# Altium PCB OCP2PCIe-H-F-4.PcbDoc
Units mm, origin at the board's own origin, x right, y up, seen from the top; angles counter-clockwise.
Board outline 100 x 82.75 mm, 2 copper layers (Top Layer, Bottom Layer); 19 components, 30 nets, 222 pads, 151 vias.
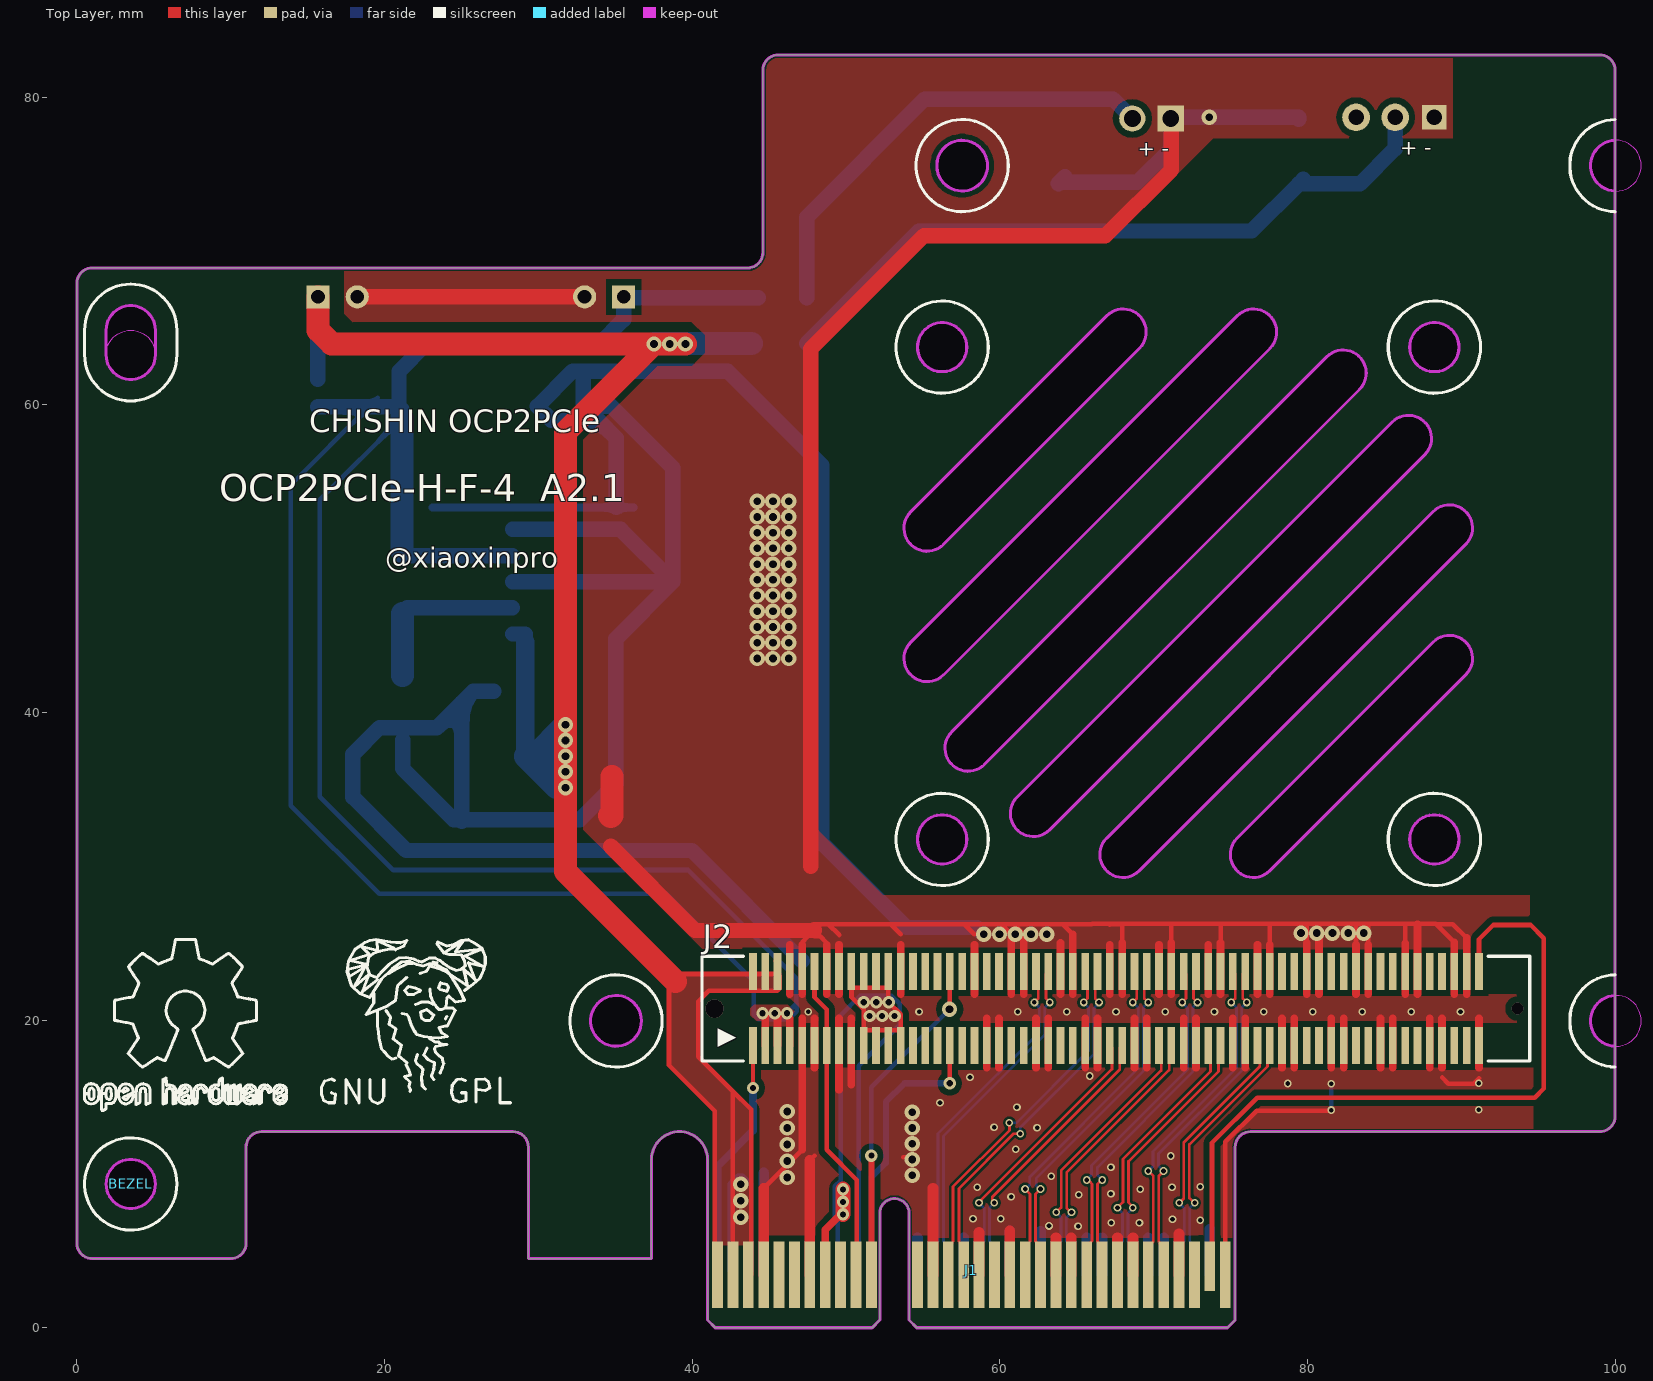
[diagram p0: Top Layer view]
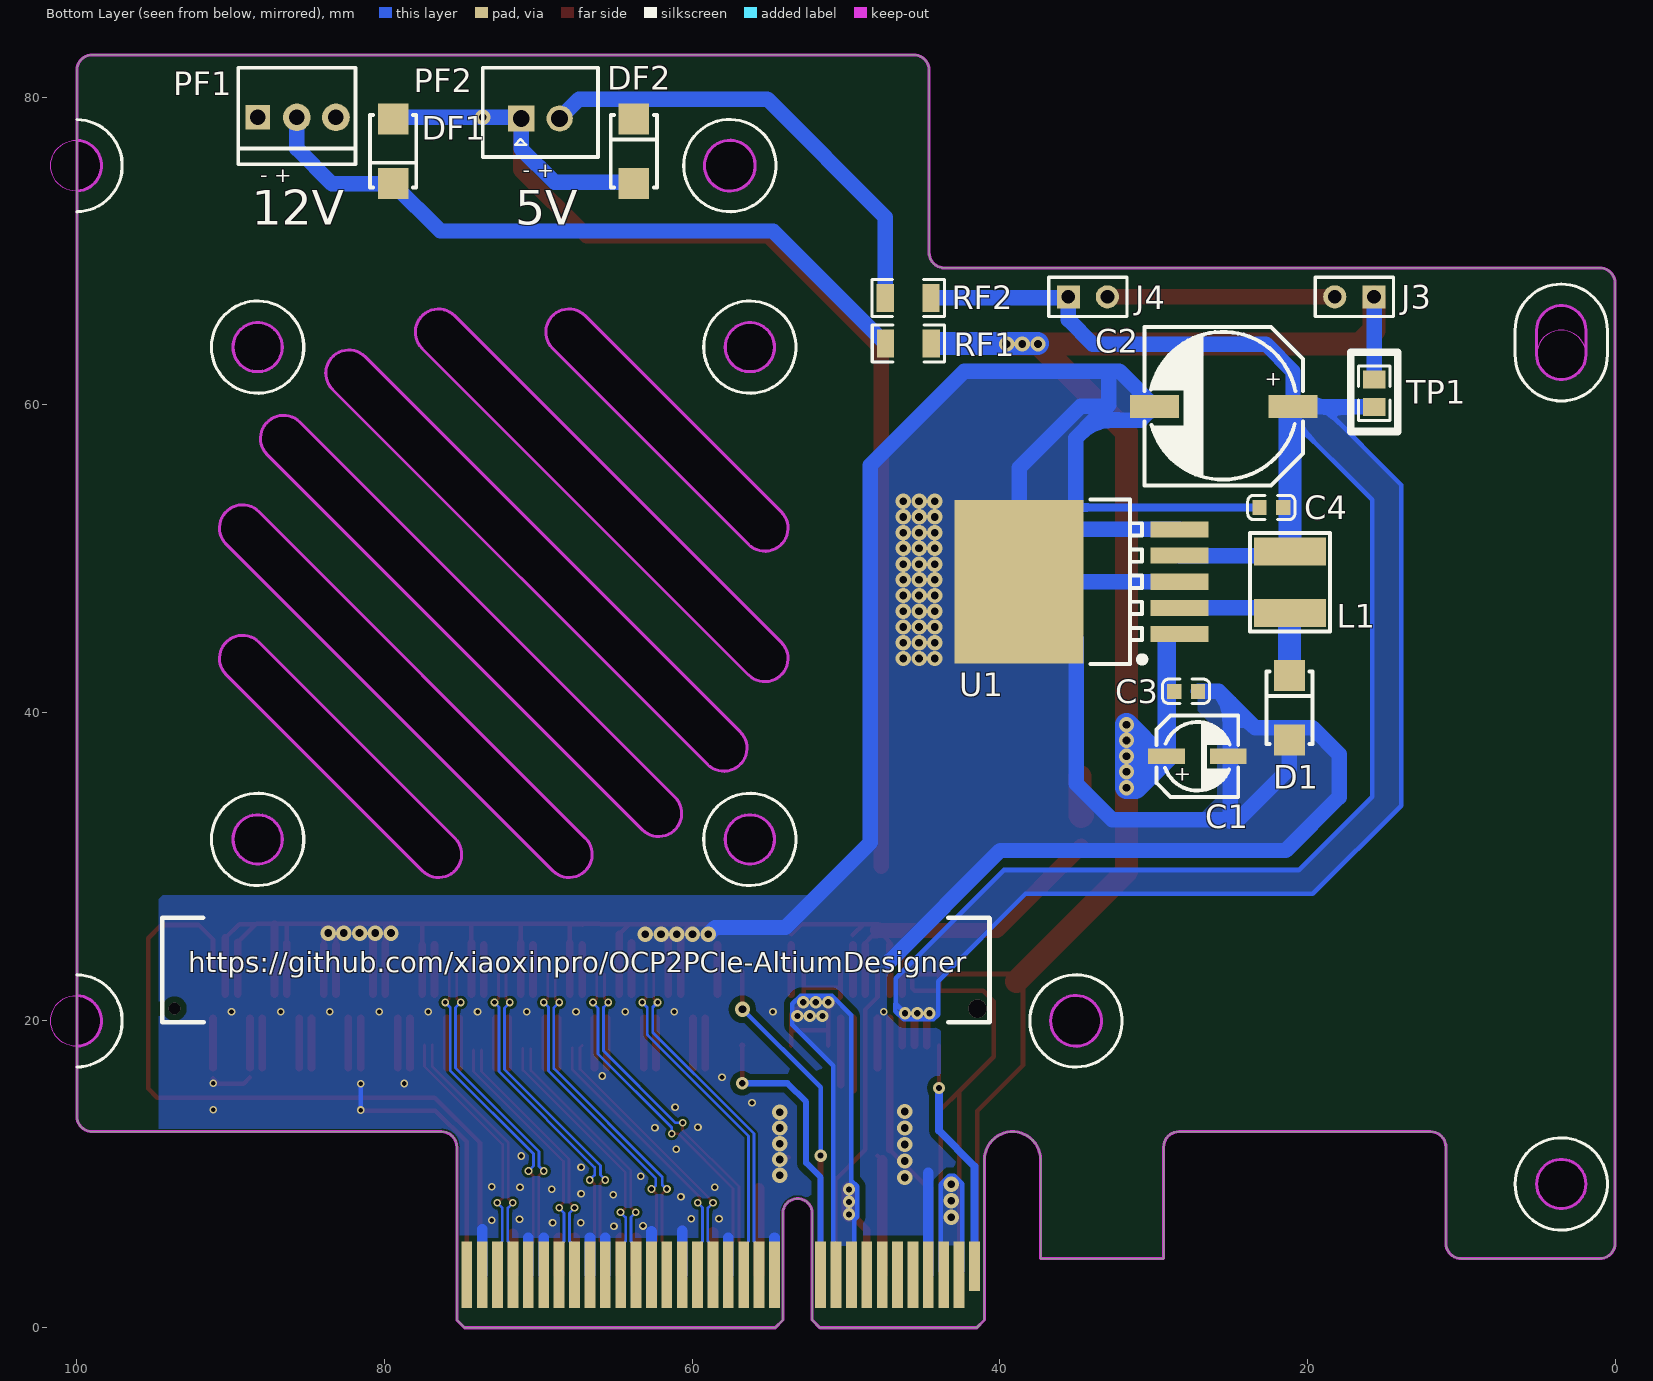
[diagram p1: Bottom Layer view, seen from below]
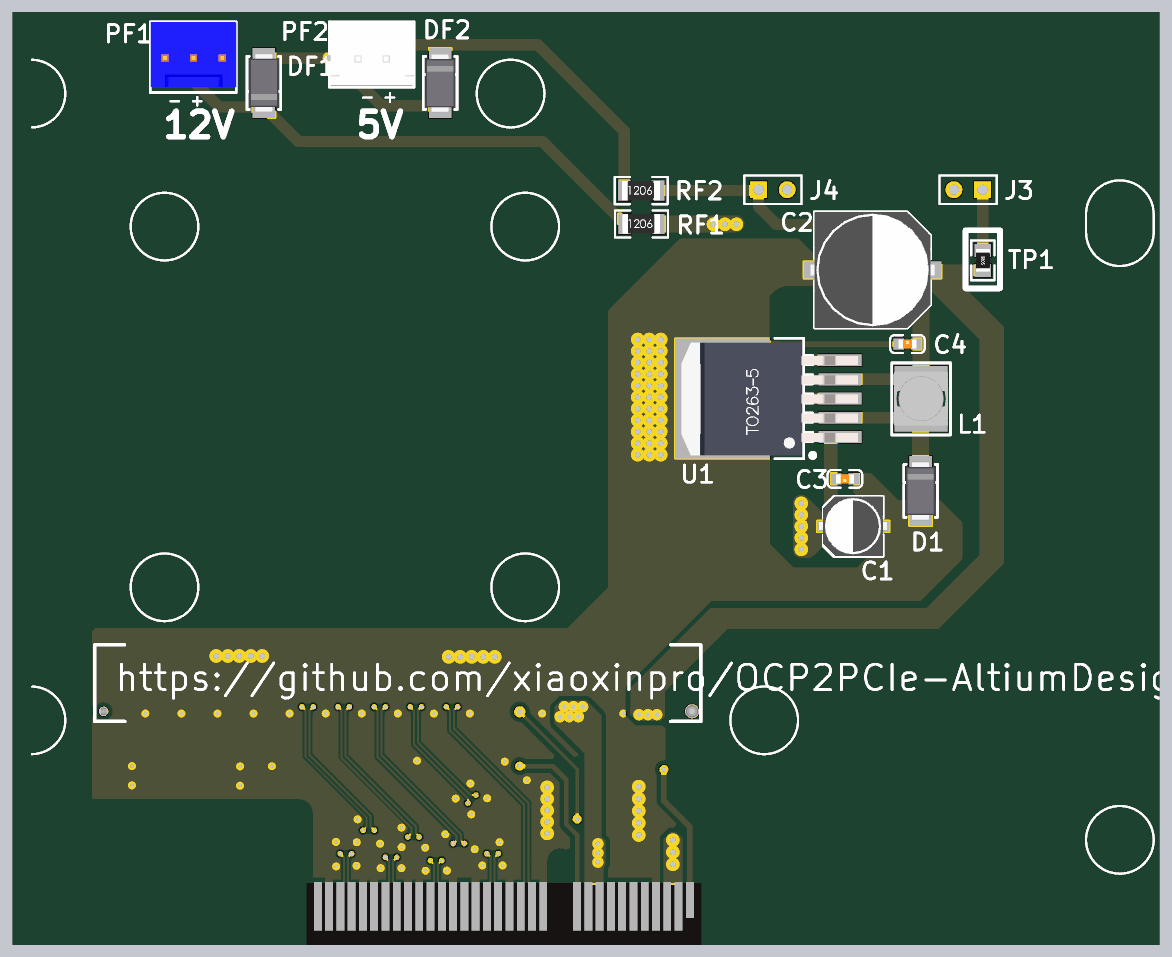
[diagram p2: 3D render of the assembled board from below, using the file's embedded part models]

## Layer stack, top to bottom
Top Solder: solder mask 0.0102, Solder Resist, Dk 3.5
Top Layer: signal copper 0.0356
Dielectric 1: dielectric 0.32, FR-4, Dk 4.8
Bottom Layer: signal copper 0.0356
Bottom Solder: solder mask 0.0102, Solder Resist, Dk 3.5

## Board outline
1,4.5 10,4.5 ccw(c10,5.5) 11,5.5 11,11.75 cw(c12,11.75) 12,12.75 28.35,12.75 cw(c28.35,11.75) 29.35,11.75 29.35,4.5 37.35,4.5 37.35,10.925 cw(c39.175,10.925) 41,10.925 41,0.5 41.5,0 51.7,0 52.2,0.5 52.2,7.45 cw(c53.15,7.45) 54.1,7.45 54.1,0.5 54.6,0 74.8,0 75.3,0.5 75.3,11.75 cw(c76.3,11.75) 76.3,12.75 99,12.75 ccw(c99,13.75) 100,13.75 100,81.75 ccw(c99,81.75) 99,82.75 45.6,82.75 ccw(c45.6,81.75) 44.6,81.75 44.6,69.9 cw(c43.6,69.9) 43.6,68.9 1,68.9 ccw(c1,67.9) 0,67.9 0,5.5 ccw(c1,5.5)
cut-out: 1.9,63.25 1.9,64.85 cw(c3.5,64.85) 5.1,64.85 5.1,63.25 cw(c3.5,63.25)
cut-out: 56.876,38.741 ccw(c57.937,37.68) 58.998,36.619 58.998,36.62 83.381,61.002 ccw(c82.32,62.063) 81.259,63.123
cut-out: 61.119,34.498 ccw(c62.18,33.437) 63.241,32.376 63.241,32.377 87.623,56.759 87.624,56.759 ccw(c86.563,57.82) 85.502,58.881
cut-out: 75.422,31.831 ccw(c76.483,30.77) 77.544,29.709 77.543,29.709 90.291,42.457 ccw(c89.23,43.517) 88.169,44.578 88.17,44.578
cut-out: 66.94,31.835 ccw(c68.001,30.774) 69.062,29.713 90.287,50.938 ccw(c89.226,51.999) 88.165,53.059 88.166,53.059
cut-out: 54.213,44.562 ccw(c55.274,43.502) 56.335,42.441 56.334,42.441 77.559,63.666 77.56,63.666 ccw(c76.499,64.727) 75.438,65.787
cut-out: 54.209,53.043 ccw(c55.27,51.983) 56.331,50.922 56.33,50.922 69.078,63.67 ccw(c68.017,64.73) 66.956,65.791 66.957,65.791
cut-out: 98.4,19.95 ccw(c100.05,19.95) 100.05,18.3 ccw(c100.05,19.95) 101.7,19.95 ccw(c100.05,19.95) 100.05,21.6 ccw(c100.05,19.95)
cut-out: 86.65,31.75 ccw(c88.25,31.75) 88.25,30.15 ccw(c88.25,31.75) 89.85,31.75 ccw(c88.25,31.75) 88.25,33.35 ccw(c88.25,31.75)
cut-out: 54.65,31.75 ccw(c56.25,31.75) 56.25,30.15 ccw(c56.25,31.75) 57.85,31.75 ccw(c56.25,31.75) 56.25,33.35 ccw(c56.25,31.75)
cut-out: 33.4,19.95 ccw(c35.05,19.95) 35.05,18.3 ccw(c35.05,19.95) 36.7,19.95 ccw(c35.05,19.95) 35.05,21.6 ccw(c35.05,19.95)
cut-out: 54.65,63.75 ccw(c56.25,63.75) 56.25,62.15 ccw(c56.25,63.75) 57.85,63.75 ccw(c56.25,63.75) 56.25,65.35 ccw(c56.25,63.75)
cut-out: 86.65,63.75 ccw(c88.25,63.75) 88.25,62.15 ccw(c88.25,63.75) 89.85,63.75 ccw(c88.25,63.75) 88.25,65.35 ccw(c88.25,63.75)
cut-out: 98.4,75.55 ccw(c100.05,75.55) 100.05,73.9 ccw(c100.05,75.55) 101.7,75.55 ccw(c100.05,75.55) 100.05,77.2 ccw(c100.05,75.55)
cut-out: 57.55,73.9 cw(c57.55,75.55) 55.9,75.55 cw(c57.55,75.55) 57.55,77.2 cw(c57.55,75.55) 59.2,75.55 cw(c57.55,75.55)
cut-out: 3.5,61.65 cw(c3.5,63.25) 1.9,63.25 cw(c3.5,63.25) 3.5,64.85 cw(c3.5,63.25) 5.1,63.25 cw(c3.5,63.25)
cut-out: 1.9,9.35 ccw(c3.5,9.35) 3.5,7.75 ccw(c3.5,9.35) 5.1,9.35 ccw(c3.5,9.35) 3.5,10.95 ccw(c3.5,9.35)

## Design rules (kind name [scope] priority, off if disabled: settings)
Clearance "Schematic Clearance Constraint" [InNetClass('PCIe')] p1: gap=0.178 ignorepadtopadclearanceinfootprint=FALSE
Clearance Clearance_1 [OnLayer('Keep-Out Layer')] p2: gap=0.1 ignorepadtopadclearanceinfootprint=FALSE
Clearance Clearance_InPoly [(InPoly)] p3: gap=0.4 ignorepadtopadclearanceinfootprint=FALSE
Clearance [All] p4: gap=0.254 ignorepadtopadclearanceinfootprint=FALSE
ComponentClearance [All] p1 off: gap=0.254 collisioncheckmode=3 verticalgap=0.254 showdistances=FALSE
Height [All] p1 off: minheight=0 maxheight=25.4 prefheight=12.7
MinimumSolderMaskSliver [All] p1 off: minsoldermaskwidth=0.254
PlaneClearance [All] p1: clearance=0.8
PlaneConnect [All] p1: planeconnectstyle=Direct reliefexpansion=0.508 reliefentries=4 reliefconductorwidth=0.254 reliefairgap=0.254
PolygonConnect [All] p1: connectstyle=Direct reliefconductorwidth=0.254 reliefentries=4 polygonreliefangle="90 Angle" airgapwidth=0.254
RoutingVias "Schematic Routing Via Style" [InNetClass('PCIe')] p1: holewidth=0.356 width=0.635 viastyle="Through Hole" minholewidth=0.356 minwidth=0.635 maxholewidth=0.356 maxwidth=0.635
RoutingVias [All] p2: holewidth=1 width=0.5 viastyle="Through Hole" minholewidth=0 minwidth=0 maxholewidth=10 maxwidth=10
SilkToSilkClearance [All] p1 off: silktosilkclearance=0
SilkToSolderMaskClearance [IsPad] p1 off: minsilkscreentomaskgap=0 clearancetoexposedcopper=TRUE
SolderMaskExpansion [All] p1: expansion=0.102
UnRoutedNet [All] p1: checkbadconnections=TRUE
Width "Schematic Width Constraint" [InNetClass('PCIe')] p1: maxlimit=0.178 minlimit=0.178 preferedwidth=0.178
Width [All] p2: maxlimit=10 minlimit=0.254 preferedwidth=0.3
22 further rules are at their usual default settings.

## Classes and differential pairs
net class PCIe: HSI0_N HSI0_P HSI1_N HSI1_P HSI2_N HSI2_P HSI3_N HSI3_P HSO0_N HSO0_P HSO1_N HSO1_P HSO2_N HSO2_P HSO3_N HSO3_P REFCLK_N REFCLK_P

## Components (designator, comment, footprint, x,y, rotation, side; value= is the part's Value field where it differs from the comment)
BEZEL "BEZEL" BEZEL 3.517,9.362 r0 top
C1 "100uF" CAP-SMD_BD5.0-L5.3-W5.3-FD 27.151,37.149 r180 bottom
C2 "1000uF" CAP-SMD_BD10.0-L10.3-W10.3-FD 25.439,59.904 r0 bottom
C3 "100nF" 0603_C 27.89,41.375 r0 bottom
C4 "100nF" 0603_C 22.351,53.329 r180 bottom
D1 "SS34" SMA(DO-214AC)_S1 21.172,40.308 r270 bottom
DF1 "SS14" SMA(DO-214AC)_S1 79.437,76.49 r90 bottom
DF2 "SS14" SMA(DO-214AC)_S1 63.793,76.49 r270 bottom
J1 "PCI Express x4" "PCI EXPRESS X4" 41,8.4 r0 top locked
J2 "Conn_02x40_Top_Bottom" Conn_02x40_Top_Bottom 43.95,18.35 r0 top locked
J3 "Conn_01x02" Conn_01x02 15.684,67.022 r0 bottom
J4 "Conn_01x02" Conn_01x02 35.548,67.022 r180 bottom
L1 "100uH" SMD_5050 21.134,48.464 r90 bottom
PF1 "KF2510_3" CONN-KF_2510_3PIN 85.701,78.689 r0 bottom
PF2 "XH2.50_2" CONN-TH_P2.50_2PIN 69.864,78.615 r0 bottom
RF1 "470Ω" 1206_R 45.939,63.989 r180 bottom
RF2 "470Ω" 1206_R 45.964,66.944 r180 bottom
TP1 "0Ω" 0805_R 15.657,60.756 r270 bottom
U1 "LM2576SX-5.0" TO-263-5 28.446,48.5 r180 bottom

## Footprints (in the part's own frame and the unit in brackets; to place one, negate y for a bottom-side part, rotate by r counter-clockwise, add the part's x,y. Pads: shape width x height; smd on the part's side, far side on the other; paste and mask are expansions set on the pad)
0603_C [mm]
  rect 0.93x0.98 smd: 1(-0.77,0) 2(0.77,0)
  silkscreen extent -1.53,-0.79 1.54,0.79, body extent -0.8,-0.4 0.8,0.4, height 0.3
0805_R [mm]
  rect 1.16x1.47 smd: 1(-0.89,0) 2(0.89,0)
  silkscreen extent -1.77,-1.04 1.77,1.03, body extent -1,-0.63 1,0.63, height 0.49
1206_R [mm]
  rect 1.13x1.8 smd: 1(-1.49,0) 2(1.49,0)
  silkscreen extent -2.36,-1.2 2.35,1.2, body extent -1.7,-0.86 1.65,0.87, height 0.85
BEZEL [mm] "PCIe挡板"
  body extent -21.23,-24.45 5.2,96.64, height 16.6
CAP-SMD_BD5.0-L5.3-W5.3-FD [mm]
  rect 2.4x1 smd: 1(-2,0) 2(2,0)
  silkscreen extent -2.65,-2.65 2.65,2.65, body extent -3.02,-2.62 2.98,2.68, height 5.9
CAP-SMD_BD10.0-L10.3-W10.3-FD [mm]
  rect 3.2x1.5 smd: 1(-4.5,0) 2(4.5,0)
  silkscreen extent -5.15,-5.15 5.15,5.15, body extent -5.5,-5.15 5.5,5.15, height 12.6
CONN-KF_2510_3PIN [mm]
  rect 1.6x1.6 hole 1: 1(2.54,0)
  round 1.8 hole 1: 2(0,0) 3(-2.54,0)
  silkscreen extent -3.81,-3.23 3.81,3.05, body extent -3.83,-3.21 3.77,2.59, height 11.5
CONN-TH_P2.50_2PIN [mm]
  rect 1.7x1.7 hole 1.1: 1(1.25,0)
  round 1.7 hole 1.1: 2(-1.25,0)
  silkscreen extent -3.75,-3.3 3.75,2.5, body extent -3.73,-3.41 3.67,2.34, height 7.1
Conn_01x02 [mm] "Connector; Header; 2 Position"
  rect 1.5x1.5 hole 0.9: 1(0,0)
  round 1.5 hole 0.9: 2(2.54,0)
  silkscreen extent -1.27,-1.27 3.81,1.27
Conn_02x40_Top_Bottom [mm] "Conn_02x40_Top_Bottom"
  rect 0.5x2.4 smd: 1(0,0) 2(0.8,0) 3(1.6,0) 4(2.4,0) 5(3.2,0) 6(4,0) 7(4.8,0) 8(5.6,0) 9(6.4,0) 10(7.2,0) 11(8,0) 12(8.8,0) 13(9.6,0) 14(10.4,0) 15(11.2,0) 16(12,0) 17(12.8,0) 18(13.6,0) 19(14.4,0) 20(15.2,0) 21(16,0) 22(16.8,0) 23(17.6,0) 24(18.4,0) 25(19.2,0) 26(20,0) 27(20.8,0) 28(21.6,0) 29(22.4,0) 30(23.2,0) 31(24,0) 32(24.8,0) 33(25.6,0) 34(26.4,0) 35(27.2,0) 36(28,0) 37(28.8,0) 38(29.6,0) 39(30.4,0) 40(31.2,0) 41(32,0) 42(32.8,0) 43(33.6,0) 44(34.4,0) 45(35.2,0) 46(36,0) 47(36.8,0) 48(37.6,0) 49(38.4,0) 50(39.2,0) 51(40,0) 52(40.8,0) 53(41.6,0) 54(42.4,0) 55(43.2,0) 56(44,0) 57(44.8,0) 58(45.6,0) 59(46.4,0) 60(47.2,0) 61(0,4.8) 61(0,4.8) 62(0.8,4.8) 63(1.6,4.8) 64(2.4,4.8) 65(3.2,4.8) 66(4,4.8) 67(4.8,4.8) 68(5.6,4.8) 69(6.4,4.8) 70(7.2,4.8) 71(8,4.8) 72(8.8,4.8) 73(9.6,4.8) 74(10.4,4.8) 75(11.2,4.8) 76(12,4.8) 77(12.8,4.8) 78(13.6,4.8) 79(14.4,4.8) 80(15.2,4.8) 81(16,4.8) 82(16.8,4.8) 83(17.6,4.8) 84(18.4,4.8) 85(19.2,4.8) 86(20,4.8) 87(20.8,4.8) 88(21.6,4.8) 89(22.4,4.8) 90(23.2,4.8) 91(24,4.8) 92(24.8,4.8) 93(25.6,4.8) 94(26.4,4.8) 95(27.2,4.8) 96(28,4.8) 97(28.8,4.8) 98(29.6,4.8) 99(30.4,4.8) 100(31.2,4.8) 101(32,4.8) 102(32.8,4.8) 103(33.6,4.8) 104(34.4,4.8) 105(35.2,4.8) 106(36,4.8) 107(36.8,4.8) 108(37.6,4.8) 109(38.4,4.8) 110(39.2,4.8) 111(40,4.8) 112(40.8,4.8) 113(41.6,4.8) 114(42.4,4.8) 115(43.2,4.8) 116(44,4.8) 117(44.8,4.8) 118(45.6,4.8) 119(46.4,4.8) 120(47.2,4.8)
  silkscreen extent -3.3,-1 50.5,5.8, body extent -3.3,-1 50.5,5.8, height 11.8
"PCI EXPRESS X4" [mm] "PCI Express x4"
  rect 0.7x3.2 smd far side: A1(0.65,-4.4)
  rect 0.7x4.3 smd far side: A2(1.65,-4.95) A3(2.65,-4.95) A4(3.65,-4.95) A5(4.65,-4.95) A6(5.65,-4.95) A7(6.65,-4.95) A8(7.65,-4.95) A9(8.65,-4.95) A10(9.65,-4.95) A11(10.65,-4.95) A12(13.65,-4.95) A13(14.65,-4.95) A14(15.65,-4.95) A15(16.65,-4.95) A16(17.65,-4.95) A17(18.65,-4.95) A18(19.65,-4.95) A19(20.65,-4.95) A20(21.65,-4.95) A21(22.65,-4.95) A22(23.65,-4.95) A23(24.65,-4.95) A24(25.65,-4.95) A25(26.65,-4.95) A26(27.65,-4.95) A27(28.65,-4.95) A28(29.65,-4.95) A29(30.65,-4.95) A30(31.65,-4.95) A31(32.65,-4.95) A32(33.65,-4.95)
  rect 0.7x4.3 smd: B1(0.65,-4.95) B2(1.65,-4.95) B3(2.65,-4.95) B4(3.65,-4.95) B5(4.65,-4.95) B6(5.65,-4.95) B7(6.65,-4.95) B8(7.65,-4.95) B9(8.65,-4.95) B10(9.65,-4.95) B11(10.65,-4.953) B12(13.65,-4.95) B13(14.65,-4.95) B14(15.65,-4.95) B15(16.65,-4.95) B16(17.65,-4.95) B17(18.65,-4.95) B18(19.65,-4.95) B19(20.65,-4.95) B20(21.65,-4.95) B21(22.65,-4.95) B22(23.65,-4.95) B23(24.65,-4.95) B24(25.65,-4.95) B25(26.65,-4.95) B26(27.65,-4.95) B27(28.65,-4.95) B28(29.65,-4.95) B29(30.65,-4.95) B30(31.65,-4.95) B32(33.65,-4.95)
  rect 0.7x3.2 smd: B31(32.65,-4.4)
  Keep-Out Layer lines w0.2: 0,0 0,-7.9 0.5,-8.4 10.7,-8.4 11.2,-7.9 11.2,-0.95 cw(c12.15,-0.95) 13.1,-0.95 13.1,-7.9 13.6,-8.4 33.8,-8.4 34.3,-7.9 34.3,0
SMA(DO-214AC)_S1 [mm]
  rect 2x2 smd: 1(2.1,0) 2(-2.1,0)
  silkscreen extent -2.35,-1.5 2.35,1.5, body extent -2.59,-1.3 2.61,1.3, height 2.4
SMD_5050 [mm] "贴片电感5.0x5.0"
  rect 1.8x4.7 smd: 1(-2,0) 2(2,0)
  silkscreen extent -3.2,-2.6 3.2,2.6, body extent -2.38,-2.4 2.42,2.4, height 2.8
TO-263-5 [mm]
  rect 8.4x10.65 smd: 0(-10.3,0)
  rect 3.8x1.05 smd: 1(0.127,-3.4) 2(0.127,-1.7) 3(0.127,0) 4(0.127,1.7) 5(0.127,3.4)
  silkscreen extent -5.65,-5.35 -2.1,5.35, body extent -13.96,-5.04 1.71,4.96, height 4.83

## Part data
BEZEL: "PCIe挡板"
C1 C2: library part 7343_CP, "贴片铝电解电容", Package=3528, SuppliersPartNumber=C16133, ComponentLink1Description=¹©Ó, ComponentLink1URL=http://www.szlcsc.com/product/details_16815.html, Supplier=LC
C3 C4: library part "0805 Cap", "贴片电容", Package=0805, SuppliersPartNumber=C28323, ComponentLink1Description=¹©Ó, ComponentLink1URL=http://www.szlcsc.com/product/details_29074.html, Supplier=LC
D1: library part "SMA(DO-214AC) M7", "肖特基二极管", Package=SMA(DO-214AC), SuppliersPartNumber=C95872, ComponentLink1Description=¹©Ó, ComponentLink1URL=http://www.szlcsc.com/product/details_2841.html, Notepad="1N4007 4007 编号C2464 已经", Supplier=LC
DF1 DF2: library part "SMA(DO-214AC) M7", "二极管", Package=SMA(DO-214AC), SuppliersPartNumber=C95872, ComponentLink1Description=¹©Ó, ComponentLink1URL=http://www.szlcsc.com/product/details_2841.html, Notepad="1N4007 4007 编号C2464 已经", Supplier=LC
J1: "插座-PCIe"
J2: "插座-0.8mm"
J3 J4: "插座-2.54mm", LatestRevisionDate=17-Jul-2002, LatestRevisionNote="Re-released for DXP Platform.", Publisher="Altium Limited"
L1: library part SDM_Inductors, "贴片电感", Package=0402, SuppliersPartNumber=C24563, ComponentLink1Description=¹©Ó, ComponentLink1URL=http://www.szlcsc.com/product/details_25303.html, Supplier=LC
PF1: library part Conn_KF2510_3, "插座-KF2510-3", LatestRevisionDate=17-Jul-2002, LatestRevisionNote="Re-released for DXP Platform.", Publisher="Altium Limited"
PF2: library part Conn_XH2.50_2, "插座-2.50mm", LatestRevisionDate=17-Jul-2002, LatestRevisionNote="Re-released for DXP Platform.", Publisher="Altium Limited"
RF1 RF2: library part 1206_R, "贴片电阻", Package=0805, SuppliersPartNumber=C17477, ComponentLink1Description=¹©Ó, ComponentLink1URL=http://www.szlcsc.com/product/details_18165.html, Supplier=LC
TP1: library part "0805 0Ω (0R0) 1%", "贴片电阻", Package=0805, SuppliersPartNumber=C17477, ComponentLink1Description=¹©Ó, ComponentLink1URL=http://www.szlcsc.com/product/details_18165.html, Supplier=LC
U1: "DC-DCоƬ", Package=TO-263-5, SuppliersPartNumber=C34465, ComponentLink1Description=¹©Ó, ComponentLink1URL=http://www.szlcsc.com/product/details_35434.html, Supplier=LC

## Via types
v1: diameter 0.5, hole 0.3, Top Layer to Bottom Layer, 68 vias
v2: diameter 1, hole 0.5, Top Layer to Bottom Layer, 66 vias
v3: diameter 0.8, hole 0.4, Top Layer to Bottom Layer, 15 vias
v4: diameter 1.2, hole 1.2, Top Layer to Bottom Layer, 1 vias
v5: diameter 0.8, hole 0.8, Top Layer to Bottom Layer, 1 vias

## Nets (pads, with @x,y where several pads share a name; then routed paths per layer and width w, separated by ;. In a path a pad name is that pad's centre, name@x,y a point inside that pad or via, vN(x,y) a via of type N, cw(c..) or ccw(c..) an arc to the next point about the centre after c; other vN are vias at no path point)
3V3AUX: J1.B10 J2.7 J2.66 | length 19.9
  Top Layer w0.3: J2.66 47.95,21.49 48.75,20.69 J2.7 48.75,11.567 50.71,9.607 J1.B10@50.71,4.37
+3.3: J1.A9 J1.A10 J1.B8 J2.10 J2.11 J2.12 J2.13 J2.69 J2.70 J2.71 J2.72 | length 64.2
  Top Layer w0.3: J2.10 51.15,20.707 50.357,21.5 J2.69@50.357,22.193 ; J2.10@51.156,19.346 J2.13@53.55,19.346 ; J2.72@52.551,22.1 50.45,22.1 J2.69@50.357,22.193 ; J2.72 52.75,21.175 53.55,20.375 J2.13@53.55,19.346 ; J2.13 J2.13@53.55,19.346 ; J2.13@53.569,19.346 J2.13@53.55,19.346 ; J2.69@50.357,22.193 50.357,23.143 J2.69 50.35,22.2 J2.69@50.357,22.193
  Top Layer w0.5: J1.B8 48.65,6.372 v3@49.65,7.372
  Top Layer w1: v3(49.802,7.372) v3(49.802,8.184) v3(49.802,8.997)
  Bottom Layer w0.3: J1.A9@49.454,3.646 49.454,7.027 49.277,7.205 49.277,8.997 49.277,9.196 49.65,9.569 ; v3@49.65,8.997 49.65,9.569 ; v3(49.802,7.372) v3(49.802,8.184) v3(49.802,8.997) ; J1.A10@50.841,3.45 50.841,17.034 53.493,19.686 53.493,21.061 52.985,21.569 50.889,21.569 49.65,20.329 49.65,9.569
  other v3: 51.538,20.269 52.35,20.269 53.162,20.269 51.156,21.162 51.968,21.162 52.781,21.162
+5: C2.1 C4.2 J2.2 J2.3 J2.4 J4.1 L1.2 RF2.2 TP1.2 U1.4 | length 193.5
  Top Layer w0.3: v3@44.75,20.141 45.009,20.4 v3@45.543,20.4 ; v3@45.536,20.451 45.543,20.444 v3@45.543,20.4 ; J2.3@45.543,18.357 J2.3 ; v3@46.35,20.103 46.053,20.4 v3@45.543,20.4
  Top Layer w0.5: J2.2 v3@44.75,20.141 ; J2.3@45.543,18.357 v3@45.543,20.4 ; J2.4 v3@46.35,20.103
  Bottom Layer w0.3: C2.1@19.571,60.452 18.984,59.866 13.906,54.788 13.906,33.947 19.647,28.207 38.329,28.207 44.006,22.529 44.006,20.35 44.311,20.045 44.997,20.045 ; C2.1@21.134,59.172 15.786,53.824 15.786,34.531 20.561,29.756 39.751,29.756 46.775,22.732 46.775,21.061 ; v3(45.371,20.451) 45.371,20.419 44.997,20.045 ; v3(46.165,20.451) 46.775,21.061 ; 44.997,20.045 46.254,20.045 46.787,20.578 46.787,21.048 46.775,21.061
  Bottom Layer w1: TP1.2 18.984,59.866 20.901,59.866 C2.1 ; L1.2 21.398,50.2 U1.4 ; C2.1@21.134,59.172 21.134,59.709 C2.1 ; RF2.2@44.315,66.952 35.618,66.952 J4.1 35.548,65.532 33.96,63.944 22.705,63.944 20.939,62.178 C2.1
  Bottom Layer w1.5: L1.2 C2.1@21.134,59.172
  other v3: 44.578,20.451
+12: C1.1 C3.2 J1.A2 J1.A3 J1.B1 J1.B2 J1.B3 J2.61 J2.62 J2.63 J3.1 RF1.2 TP1.1 U1.1 | length 186.8
  Top Layer w0.254: J2.63@45.427,22.997 45.55,23.12 J2.63 45.55,23.719 J2.63@45.427,23.842
  Top Layer w0.3: 38.912,22.518 38.494,22.1 38.494,17.06 41.46,14.095 J1.B1@41.46,3.45 ; 39.391,22.997 J2.61@43.95,22.997 ; J1.B2 42.65,15.368 ; J1.B3@43.828,3.45 43.828,14.181 43.837,14.181 ; 43.828,14.19 42.65,15.368 ; J2.61@43.95,23.15 J2.61@43.95,22.997 ; J2.63@45.427,22.997 J2.61@43.95,22.997 ; J2.63@45.696,22.919 45.696,22.076 45.52,21.9 43.95,21.9 ; 42.65,15.368 40.387,17.632 40.387,21.213 41.073,21.9 43.95,21.9 ; 43.95,21.9 J2.61@43.95,22.997
  Top Layer w1.5: J3.1 15.684,64.834 16.561,63.957 v2(37.516,63.957) ; 38.912,22.518 31.763,29.667 v2(31.763,35.115) v2(31.763,36.138) v2(31.763,37.16) v2(31.763,38.183) v2(31.763,39.205) 31.763,58.204 v2(37.516,63.957) ; v2(39.56,63.957) v2(38.538,63.957) v2(37.516,63.957)
  Bottom Layer w0.3: J1.A2@42.444,3.656 42.444,9.364 42.965,9.885 43.295,9.885 43.841,9.339 J1.A3@43.841,3.666
  Bottom Layer w1: TP1.1 15.657,66.996 J3.1 ; U1.1 29.151,45.1 29.151,44.552
  Bottom Layer w1.2: C1.1 29.151,44.552
  Bottom Layer w1.5: 30.975,36.176 30.975,38.221 ; v2@37.556,63.997 43.84,63.997 ; C1.1 31.185,35.115 v2(31.763,35.115) v2(31.763,36.138) v2(31.763,37.16) v2(31.763,38.183) v2(31.763,39.205) C1.1@29.718,37.16 ; C1.1 29.162,37.16 C1.1@29.707,37.16 ; C1.1 C1.1@29.707,37.149 ; C1.1@29.707,37.149 C1.1@29.707,37.16 ; C1.1@29.707,37.149 C1.1@29.718,37.16 ; C1.1@29.707,37.16 C1.1@29.718,37.16
  other v2: 43.155,7.18 43.155,8.253 43.155,9.326
GND: C1.2 C2.2 C3.1 C4.1 D1.1 DF1.1 DF2.1 J1.A4 J1.A12 J1.A15 J1.A18 J1.A20 J1.A23 J1.A24 J1.A27 J1.A28 J1.A31 J1.B4 J1.B7 J1.B13 J1.B16 J1.B18 J1.B21 J1.B22 J1.B25 J1.B26 J1.B29 J1.B32 J2.5 J2.6 J2.8 J2.9 J2.20 J2.21 J2.24 J2.25 J2.28 J2.29 J2.32 J2.33 J2.36 J2.37 J2.40 J2.41 J2.44 J2.45 J2.48 J2.49 J2.52 J2.53 J2.56 J2.57 J2.60 J2.64 J2.65 J2.67 J2.68 J2.73 J2.79 J2.82 J2.83 J2.86 J2.87 J2.90 J2.91 J2.94 J2.95 J2.98 J2.99 J2.102 J2.103 J2.106 J2.107 J2.110 J2.111 J2.114 J2.115 J2.118 J2.119 J3.2 J4.2 PF1.1 PF2.1 U1.0 U1.3 U1.5 | length 688.7
  Top Layer w0.3: 44.65,9.068 47.15,11.568 ; 46.35,25.513 46.66,25.823 ; 47.15,25.068 47.524,25.442 ; 47.65,10.875 47.95,11.175 ; 47.93,25.442 48.324,25.442 48.75,25.016 ; 47.93,26.242 48.845,26.242 ; J2.8@49.467,19.4 J2.8@49.494,19.373 ; 49.55,25.537 48.845,26.242 ; 53.55,25.588 52.896,26.242 ; 53.724,11.088 v2@54.306,11.088 ; 58.35,25.588 57.696,26.242 ; v2@60.75,25.588 60.096,26.242 ; v2@61.55,25.588 60.896,26.242 ; 64.091,26.237 64.745,25.583 ; 67.154,26.199 67.111,26.242 67.953,26.242 J2.91@67.953,23.153 ; J2.95 71.151,26.24 ; J2.99 74.351,26.24 ; J1.B32 74.65,12.08 76.69,14.12 v1@81.324,14.12 ; J2.103 77.551,26.24 ; J2.106@79.952,23.152 79.952,26.197 ; v2@80.751,25.658 80.751,26.24 ; J2.110 83.152,26.197 ; J2.111 83.951,26.24 ; J2.114 86.352,26.197 ; 88.75,16.271 89.155,15.867 90.806,15.867 91.15,16.211 ; 89.55,25.062 88.37,26.242 ; 90.35,25.339 89.447,26.242 88.37,26.242 ; 48.845,26.242 52.896,26.242 ; 52.896,26.242 57.696,26.242 ; 57.696,26.242 60.096,26.242 ; 60.096,26.242 60.896,26.242 ; 60.896,26.242 65.966,26.242 65.998,26.275 88.337,26.275 88.37,26.242
  Top Layer w0.5: 46.35,21.702 46.35,24.902 ; 47.15,11.568 J2.5 ; 47.15,16.902 47.15,20.102 ; 47.15,21.702 47.15,24.902 ; 47.95,16.902 47.95,20.102 ; 48.75,21.702 48.75,24.902 ; 49.55,15.475 J2.8@49.55,17.341 ; 49.55,16.902 49.55,20.102 ; 49.55,21.702 49.55,24.902 ; 50.35,15.8 J2.9 ; 50.35,16.902 50.35,20.102 ; 53.55,21.702 53.55,24.902 ; 58.35,21.702 58.35,24.902 ; 59.15,16.902 J2.20 59.15,20.102 ; 59.95,16.902 J2.21 59.95,20.102 ; 60.75,21.702 J2.82 v2@60.75,25.588 ; 61.55,21.702 J2.83 v2@61.55,25.588 ; 62.35,16.902 J2.24 62.35,20.102 ; 63.15,16.902 63.15,20.102 ; 63.95,21.702 63.95,24.902 ; J2.86 63.95,25.016 ; J2.87@64.745,23.145 64.745,25.583 ; 64.75,21.702 J2.87 64.75,24.902 ; 65.55,16.902 J2.28 65.55,20.102 ; 66.35,16.902 66.35,20.102 ; 67.15,21.702 J2.90 67.15,24.902 ; 67.95,21.702 J2.91 67.95,25.016 ; 68.75,16.902 J2.32 68.75,20.102 ; 69.55,16.902 J2.33 69.55,20.102 ; 70.35,21.702 J2.94 70.35,24.902 ; 71.15,21.702 71.15,24.902 ; J2.95 71.15,25.016 ; 71.95,16.902 J2.36 71.95,20.102 ; 72.75,16.902 72.75,20.102 ; 73.55,21.702 J2.98 73.55,24.902 ; 74.35,21.702 J2.99 74.35,25.016 ; 75.15,16.902 J2.40 75.15,20.102 ; 75.95,16.902 J2.41 75.95,20.102 ; 76.75,21.702 J2.102 76.75,24.902 ; 77.55,21.702 77.55,24.902 ; 78.35,16.902 J2.44 78.35,20.102 ; 79.15,16.902 79.15,20.102 ; 79.95,21.702 J2.106 79.95,25.016 ; 80.75,21.702 J2.107 80.75,24.902 ; J2.107 v2@80.751,25.658 ; 81.55,16.902 J2.48 81.55,20.102 ; 82.35,16.902 J2.49 82.35,20.102 ; 83.15,21.702 J2.110 83.15,24.902 ; 83.95,21.702 83.95,24.902 ; 84.75,16.902 J2.52 84.75,20.102 ; 85.55,16.902 85.55,20.102 ; 86.35,21.702 J2.114 86.35,24.987 ; 87.15,21.702 J2.115 87.15,24.902 ; J2.115@87.151,23.151 87.151,26.24 ; 87.95,16.902 J2.56 87.95,20.102 ; 88.75,16.902 88.75,20.102 ; 89.55,21.702 89.55,24.902 ; J2.118 89.55,25.062 ; 90.35,21.702 J2.119 90.35,25.339 ; 91.15,16.902 91.15,20.102
  Top Layer w0.7: J1.B4 44.65,9.068 ; J1.B7 47.65,10.875 ; J1.B13 55.65,9.068 ; J1.B16 58.65,6.198 ; J1.B18 60.65,6.286 ; J1.B21 63.65,5.854 ; J1.B22 64.65,5.854 ; J1.B25 67.65,5.854 ; J1.B26 68.65,5.854 ; J1.B29 71.65,6.096
  Top Layer w1: J3.2 J4.2 J4.2@32.918,66.933 ; 34.707,31.304 40.187,25.823 46.66,25.823 47.93,25.823 47.93,25.887 ; 47.701,29.997 47.701,63.627 55.067,70.993 66.865,70.993 71.151,75.278 71.151,78.652 PF2.1@71.188,78.689
  Top Layer w1.5: 34.627,33.304 34.707,33.224 ; 34.786,33.304 34.786,35.844
  Bottom Layer w0.3: v1(81.547,15.867) 81.547,14.154 v1(81.549,14.152)
  Bottom Layer w0.5: C4.1 35.061,53.329 U1.0@36.195,53.329
  Bottom Layer w0.7: J1.A4 44.65,10.065 ; J1.A12 54.65,5.854 ; J1.A15 57.65,5.854 ; J1.A18 60.65,6.286 ; J1.A20 62.65,6.261 ; J1.A23 65.65,5.854 ; J1.A24 66.65,5.854 ; J1.A27 69.65,5.854 ; J1.A28 70.65,5.854 ; J1.A31 73.65,6.399
  Bottom Layer w1: D1.1 21.172,36.359 24.511,33.02 25.032,33.02 ; 25.032,32.931 25.032,33.02 ; C3.1@27.09,41.375 25.767,41.375 25.032,40.64 ; U1.3 U1.0 ; U1.5 35.346,51.9 U1.0 ; 32.918,62.128 32.918,59.989 33.003,59.904 ; U1.0@35.061,53.329 35.061,57.846 33.907,59 ; 47.15,23.854 39.978,31.026 21.412,31.026 17.945,34.493 17.945,37.284 19.672,39.011 23.403,39.011 25.032,40.64 ; v2(58.954,25.582) 58.514,26.022 53.937,26.022 48.412,31.547 48.412,56.083 42.304,62.192 32.227,62.192 C2.2 30.843,59 33.907,59 ; DF2.1@63.816,74.368 DF2.1 DF2.1@63.876,74.473 ; DF2.1@64.237,74.835 DF2.1@63.876,74.473 ; DF1.1@79.425,78.568 DF1.1@79.437,78.568 ; DF1.1@79.437,78.689 71.188,78.689 PF2.1 71.114,76.638 68.948,74.473 DF2.1@63.876,74.473 ; 25.032,33.02 25.032,40.64 ; 25.032,33.02 32.69,33.02 35.039,35.369 35.039,44.793 U1.0 ; 33.003,59.904 33.907,59 ; 33.003,59.904 34.749,59.904 38.746,55.907 U1.0
  other v1: 65.088,6.608 63.196,6.621 67.234,6.837 69.076,6.837 73.026,6.989 71.222,7.053 58.255,7.078 60.059,7.078 60.732,8.513 65.126,8.653 67.222,8.704 69.127,9.009 58.535,9.136 71.197,9.136 73.038,9.161 63.335,9.847 67.222,10.431 71.121,11.168 61.037,11.612 62.421,13.009 59.627,13.034 91.138,14.178 61.113,14.343 56.109,14.635 78.728,15.879 91.136,15.892 58.065,16.286 65.849,16.37 47.549,20.553 54.751,20.553 61.164,20.553 64.351,20.553 67.551,20.553 70.751,20.553 73.951,20.553 77.151,20.553 80.351,20.553 83.551,20.553 86.751,20.553 89.951,20.553
  other v2: 46.178,9.771 54.306,9.917 46.178,10.844 54.306,10.939 46.178,11.917 54.306,11.961 46.178,12.99 54.306,12.984 54.306,14.006 46.178,14.063 59.976,25.582 60.999,25.582 62.021,25.582 63.043,25.582 79.579,25.658 80.601,25.658 81.623,25.658 82.646,25.658 83.668,25.658 44.228,43.512 45.25,43.512 46.272,43.512 44.228,44.534 45.25,44.534 46.272,44.534 44.228,45.556 45.25,45.556 46.272,45.556 44.228,46.579 45.25,46.579 46.272,46.579 44.228,47.601 45.25,47.601 46.272,47.601 44.228,48.623 45.25,48.623 46.272,48.623 44.228,49.646 45.25,49.646 46.272,49.646 44.228,50.668 45.25,50.668 46.272,50.668 44.228,51.691 45.25,51.691 46.272,51.691 44.228,52.713 45.25,52.713 46.272,52.713 44.228,53.735 45.25,53.735 46.272,53.735 73.614,78.689
HSI0_N: J1.A17 J2.31 | length 16.2
  Top Layer w0.178: v1@59.51,8.134 59.51,8.512 67.802,16.804 J2.31@67.802,18.203
  Bottom Layer w0.178: J1.A17@59.398,5.547 J1.A17@59.404,5.541 ; J1.A17@59.398,5.554 59.335,5.618 59.335,7.808 v1(59.645,8.119)
HSI0_P: J1.A16 J2.30 | length 16.8
  Top Layer w0.178: v1@58.778,8.075 58.778,8.301 67.289,16.811 67.289,18.211 J2.30
  Bottom Layer w0.178: v1(58.645,8.119) 58.979,7.784 58.979,5.63 58.776,5.427 J1.A16@58.725,5.427
HSI1_N: J1.A22 J2.35 | length 15.7
  Top Layer w0.178: 64.344,7.796 v1@64.636,7.504 ; 64.344,7.808 64.344,10.082 71.011,16.749 J2.35@71.011,18.149
  Bottom Layer w0.178: J1.A22@64.407,5.541 64.326,5.623 64.326,7.173 v1(64.661,7.509)
HSI1_P: J1.A21 J2.34 | length 15.9
  Top Layer w0.178: v1@63.671,7.504 63.988,7.821 63.988,10.229 70.491,16.731 J2.34@70.491,18.131
  Bottom Layer w0.178: v1(63.661,7.509) 63.97,7.2 63.97,5.63 63.899,5.559 J1.A21@63.899,5.18
HSI2_N: J1.A26 J2.39 | length 15.2
  Top Layer w0.178: 68.37,8.151 68.725,7.796 v1@68.751,7.796 ; 68.37,8.164 68.37,10.818 74.212,16.66 J2.39@74.212,18.06
  Bottom Layer w0.178: J1.A26@68.395,5.554 68.327,5.623 68.327,7.448 68.636,7.758 v1@68.636,7.796
  other v1: 68.649,7.801
HSI2_P: J1.A25 J2.38 | length 15.1
  Top Layer w0.178: v1@67.786,7.796 67.786,7.935 68.014,8.164 68.014,10.966 73.704,16.655 J2.38@73.704,18.055
  Bottom Layer w0.178: v1@67.659,7.77 67.971,7.458 67.971,5.613 J1.A25@67.9,5.541
  other v1: 67.649,7.801
HSI3_N: J1.A30 J2.43 | length 15.2
  Top Layer w0.178: v1@72.65,8.101 72.319,8.431 72.319,11.911 77.399,16.991 J2.43@77.399,18.39
  Bottom Layer w0.178: J1.A30@72.421,5.541 72.421,5.549 72.34,5.63 72.34,7.778 v1@72.65,8.088
  other v1: 72.662,8.119
HSI3_P: J1.A29 J2.42 | length 15.3
  Top Layer w0.178: v1@71.672,8.126 71.964,8.418 71.964,12.063 76.904,17.003 J2.42@76.904,18.403
  Bottom Layer w0.178: v1@71.659,8.113 71.984,7.788 71.984,5.643 J1.A29@71.819,5.478
  other v1: 71.662,8.119
HSO0_N: J1.B15 J2.89 | length 21.6
  Top Layer w0.178: J1.B15@57.397,5.549 57.341,5.605 57.341,9.052 60.902,12.613 v1(61.33,12.613) ; J2.89@66.198,22.998 66.198,21.402 v1(66.45,21.15)
  Bottom Layer w0.178: v1(61.33,12.613) 61.33,13.011 66.122,17.803 66.122,20.788 66.45,21.116 v1(66.45,21.15)
HSO0_P: J1.B14 J2.88 | length 21.6
  Top Layer w0.178: J1.B14@56.914,5.547 56.914,5.559 56.96,5.605 56.96,9.174 60.623,12.836 v1(60.623,13.32) ; v1(65.45,21.15) 65.7,21.4 J2.88@65.7,23
  Bottom Layer w0.178: v1(60.623,13.32) 61.08,13.32 65.766,18.007 65.766,20.834 v1(65.45,21.15)
HSO1_N: J1.B20 J2.93 | length 20.9
  Top Layer w0.178: J1.B20@62.426,5.516 62.319,5.623 62.319,8.697 v1(62.642,9.02) ; J2.93@69.398,22.998 69.398,21.402 v1(69.65,21.15)
  Bottom Layer w0.178: v1@62.629,8.99 62.363,9.256 62.363,9.717 69.348,16.702 69.348,20.848 v1(69.65,21.15)
HSO1_P: J1.B19 J2.92 | length 21
  Top Layer w0.178: v1(61.642,9.02) 61.964,8.699 61.964,5.613 J1.B19@61.893,5.541 ; v1(68.65,21.15) 68.9,21.4 J2.92@68.9,23
  Bottom Layer w0.178: v1@61.651,8.977 61.944,9.269 61.944,9.801 68.992,16.85 68.992,20.808 v1(68.65,21.15)
HSO2_N: J1.B24 J2.97 | length 21
  Top Layer w0.178: v1@66.65,9.593 66.587,9.593 66.345,9.351 66.345,5.618 66.685,5.278 J1.B24@66.685,5.265 ; J2.97@72.598,22.998 72.598,21.402 v1(72.85,21.15)
  Bottom Layer w0.178: v1@66.668,9.599 66.338,9.929 66.338,10.43 72.561,16.653 72.561,20.861 v1(72.85,21.15)
  other v1: 66.655,9.604
HSO2_P: J1.B23 J2.96 | length 22.8
  Top Layer w0.178: J1.B23 J1.B23@65.65,5.151 ; J1.B23@65.736,5.237 J1.B23@65.65,5.151 ; v1@65.825,9.491 65.85,9.491 65.99,9.351 65.99,5.643 65.65,5.303 J1.B23@65.65,5.151 ; v1(71.85,21.15) 72.1,21.4 J2.96@72.1,23
  Bottom Layer w0.178: v1@65.614,9.586 65.957,9.929 65.957,10.552 72.205,16.8 72.205,20.795 v1(71.85,21.15)
  other v1: 65.655,9.604
HSO3_N: J1.B28 J2.101 | length 20.3
  Top Layer w0.178: J1.B28@70.414,5.465 70.414,5.536 70.333,5.618 70.333,9.873 v1@70.63,10.171 ; J2.101@75.798,22.998 75.798,21.402 v1(76.05,21.15)
  Bottom Layer w0.178: v1@70.668,10.171 70.656,10.171 70.313,10.514 70.313,11.314 75.736,16.737 75.736,20.836 v1(76.05,21.15)
  other v1: 70.643,10.189
HSO3_P: J1.B27 J2.100 | length 20.2
  Top Layer w0.178: v1@69.665,10.171 69.978,9.858 69.978,5.625 J1.B27@69.881,5.529 ; v1(75.05,21.15) 75.3,21.4 J2.100@75.3,23
  Bottom Layer w0.178: v1@69.652,10.196 69.957,10.501 69.957,11.461 75.38,16.884 75.38,20.82 v1(75.05,21.15)
  other v1: 69.643,10.189
NetD1_2: D1.2 L1.1 U1.2 | length 11.4
  Bottom Layer w1: L1.1@21.172,46.427 L1.1 21.47,46.8 U1.2
  Bottom Layer w1.5: D1.2 L1.1@21.172,46.427
NetDF1_2: DF1.2 PF1.2 RF1.1 | length 46
  Bottom Layer w1: RF1.1 54.738,71.298 76.367,71.298 DF1.2@79.437,74.368 ; DF1.2@79.731,74.662 DF1.2@79.437,74.368 ; PF1.2 85.701,76.657 83.412,74.368 DF1.2@79.437,74.368
NetDF2_2: DF2.2 PF2.2 RF2.1 | length 30.1
  Bottom Layer w1: RF2.1 47.454,72.207 55.118,79.87 67.359,79.87 PF2.2
PERST: J1.A11 J2.17 | length 18.8
  Top Layer w0.3: J2.17@56.731,18.331 J2.17@56.741,18.341 ; v3@56.75,15.892 J2.17
  Top Layer w0.4: J2.17@56.741,18.341 J2.17
  Bottom Layer w0.4: J1.A11 51.65,9.77 52.596,10.717 52.596,14.679 53.809,15.892 v3(56.744,15.892) v3@56.75,15.892
PRSNT1: J1.A1 J2.1 | length 15.9
  Top Layer w0.254: v3(43.95,15.59) J2.1
  Bottom Layer w0.5: J1.A1@41.65,3.45 41.65,10.501 43.95,12.801 v3(43.95,15.59)
PRSNT2: J1.B31 J2.120 | length 48.3
  Top Layer w0.3: J1.B31@73.793,3.597 73.793,12.025 76.726,14.959 94.773,14.959 95.37,15.555 95.37,25.334 94.519,26.185 92.081,26.185 91.15,25.255 J2.120
REFCLK_N: J1.A14 J2.85 | length 22.6
  Top Layer w0.178: J2.85@62.998,22.998 62.998,21.402 v1(63.25,21.15)
  Bottom Layer w0.178: J1.A14 56.65,4.936 56.389,5.197 56.389,5.554 56.338,5.605 56.338,12.464 62.896,19.023 62.896,19.028 62.921,19.053 62.921,20.821 v1(63.25,21.15)
REFCLK_P: J1.A13 J2.84 | length 20.5
  Top Layer w0.178: v1(62.25,21.15) 62.5,21.4 J2.84@62.5,23
  Bottom Layer w0.178: J1.A13@55.896,5.519 55.896,5.531 55.982,5.618 55.982,12.617 57.029,13.663 62.561,19.195 62.561,20.839 v1(62.25,21.15)
WAKE: J1.B11 J2.77 | length 21.6
  Top Layer w0.3: v2(56.731,20.705) v2@56.741,20.715 ; J2.77@56.741,23.141 J2.77 ; v2@56.753,20.715 J2.77@56.753,23.141
  Top Layer w0.4: J1.B11 v3@51.65,10.937
  Bottom Layer w0.3: v3(51.65,11.191) 51.65,15.624 v2(56.731,20.705)
pads on no net: J1.A5 J1.A6 J1.A7 J1.A8 J1.A19 J1.A32 J1.B5 J1.B6 J1.B9 J1.B12 J1.B17 J1.B30 J2.14 J2.15 J2.16 J2.18 J2.19 J2.22 J2.23 J2.26 J2.27 J2.46 J2.47 J2.50 J2.51 J2.54 J2.55 J2.58 J2.59 J2.74 J2.75 J2.76 J2.78 J2.80 J2.81 J2.104 J2.105 J2.108 J2.109 J2.112 J2.113 J2.116 J2.117 PF1.3
copper on no net:
  other v4: 41.45,20.75
  other v5: 93.65,20.75

## Polygon pours and split planes (outlines as drawn)
GND on Bottom Layer "GND_L02_P024" (solid, remove dead copper, pour order 24): 41,5.853 75.3,5.853 75.3,11.75 76.3,12.75 94.691,12.75 94.691,27.856 94.421,28.126 48.709,28.126 43.828,23.245 43.828,12.678 41,9.851
GND on Bottom Layer "GND_L02_P036" (solid, pour order 36): 52.455,27.504 48.105,31.855 48.105,56.391 42.304,62.192 32.227,62.192 30.843,60.808 30.843,59 33.907,59 35.039,57.868 35.039,35.369 32.69,33.02 27.338,33.02 25.859,34.499 25.859,38.857 27.12,40.118 27.12,41.375 25.541,41.375 23.177,39.011 19.672,39.011 18.085,37.425 18.085,34.353 21.412,31.026 39.978,31.026 39.978,30.874 47.95,22.902
+5 on Bottom Layer "+5_L02_P032" (solid, pour order 32): 43.95,22.585 43.95,20.406 44.311,20.045 46.254,20.045 46.775,20.566 46.775,22.732 39.751,29.756 20.561,29.756 15.786,34.531 15.786,53.824 20.289,58.327 21.132,58.327 21.134,58.329 21.134,59.671 20.92,59.885 20.901,59.866 17.321,59.866 17.321,58.202 13.906,54.788 13.906,33.947 19.647,28.207 38.329,28.207
GND on Bottom Layer "GND_L02_P022" (solid, pour order 22): 52.511,8.153
+3.3 on Bottom Layer "+3.3_L02_P004" (solid, pour order 4): 49.454,5.337 50.836,5.337 50.841,5.332 50.907,5.398 50.907,17.1 53.493,19.686 53.493,21.061 52.985,21.569 50.889,21.569 49.65,20.329 49.65,9.47 49.277,9.096 49.277,7.205 49.454,7.027
+12 on Bottom Layer "+12_L02_P000" (solid, pour order 0): 42.444,5.351 43.854,5.351 43.854,9.326 43.295,9.885 42.965,9.885 42.444,9.364
GND on Top Layer "GND_L01_P018" (solid, remove dead copper, pour order 18): 41.485,5.853 75.3,5.853 75.3,11.42 76.3,12.42 94.691,12.42 94.691,16.889 41.485,16.889
GND on Top Layer "GND_L01_P038" (solid, remove dead copper, pour order 38): 47.701,32.258 47.701,63.627 55.067,70.993 67.526,70.993 73.876,77.343 89.443,77.343 89.443,82.75 45.351,82.75 44.644,82.043 44.644,69.758 43.786,68.9 17.385,68.9 17.385,65.914 17.945,65.354 17.991,65.4 39.954,65.4 40.843,64.511 40.843,63.398 39.963,62.519 36.077,62.519 31.763,58.204 31.763,32.391
GND on Top Layer "GND_L01_P020" (solid, remove dead copper, pour order 20): 94.421,24.606 40.668,24.635 32.923,32.381 32.923,37.076 43.482,37.076 52.431,28.126 94.421,28.126 94.438,28.109 94.45,24.635
GND on Top Layer "GND_L01_P030" (solid, pour order 30): 46.051,21.677 46.051,21.549 46.85,20.75 46.85,19.823 94.405,19.823 94.405,21.677
+5 on Top Layer "+5_L01_P028" (solid, pour order 28): 44.5,19.6 43.783,20.318 43.783,20.781 44.006,21.004 46.221,21.004 46.65,20.576 46.65,19.6
+3.3 on Top Layer "+3.3_L01_P026" (solid, pour order 26): 51.156,19.346 53.56,19.346 53.56,20.366 52.75,21.175 52.75,22.163 50.42,22.163 50.357,22.1 50.357,21.5 51.15,20.707
+12 on Top Layer "+12_L01_P002" (solid, pour order 2): 43.854,5.351 41.472,5.351 41.46,5.364 41.46,14.095 38.494,17.06 38.494,22.1 39.452,23.058 45.489,23.058 45.489,22.139 45.25,21.9 41.073,21.9 40.387,21.213 40.387,17.627 43.854,14.16

## Keep-outs
Keep-Out Layer:
  circle w0.2: c57.55,75.55 r1.65
  circle w0.2: c88.25,63.75 r1.6
  circle w0.2: c88.25,31.75 r1.6
  circle w0.2: c56.25,63.75 r1.6
  circle w0.2: c56.25,31.75 r1.6
  circle w0.2: c35.05,19.95 r1.65
  circle w0.2: c3.5,9.35 r1.6
  lines w0.2: 54.213,44.562 75.438,65.787 cw(c76.499,64.727) 77.56,63.666 ; 54.213,44.562 ccw(c55.274,43.502) 56.335,42.441 ; 56.33,50.922 69.078,63.67 ccw(c68.017,64.73) 66.956,65.791 ; 56.331,50.922 cw(c55.27,51.983) 54.209,53.043 66.957,65.791 ; 56.334,42.441 77.559,63.666 ; 56.876,38.741 ccw(c57.937,37.68) 58.998,36.619 83.381,61.002 ccw(c82.32,62.063) 81.259,63.123 ; 56.877,38.741 81.259,63.123 ; 61.119,34.498 ccw(c62.18,33.437) 63.241,32.376 87.623,56.759 ; 61.119,34.498 85.502,58.881 ; 75.422,31.83 88.17,44.578 cw(c89.23,43.517) 90.291,42.457 77.543,29.709 ; 75.422,31.831 ccw(c76.483,30.77) 77.544,29.709 ; 85.502,58.881 cw(c86.563,57.82) 87.624,56.759 ; 88.165,53.059 cw(c89.226,51.999) 90.287,50.938 69.062,29.713 cw(c68.001,30.774) 66.94,31.835 88.166,53.059 ; 99.989,73.901 cw(c100.05,75.55) 100,77.199 ; 99.994,21.599 ccw(c100.05,19.95) 100,18.301 ; 0,5.5 ccw(c1,5.5) 1,4.5 10,4.5 ccw(c10,5.5) 11,5.5 11,11.75 cw(c12,11.75) 12,12.75 28.35,12.75 cw(c28.35,11.75) 29.35,11.75 29.35,4.5 37.35,4.5 37.35,10.925 cw(c39.175,10.925) 41,10.925 41,8.4 41,0.5 41.5,0 51.7,0 52.2,0.5 52.2,7.45 cw(c53.15,7.45) 54.1,7.45 54.1,0.5 54.6,0 74.8,0 75.3,0.5 75.3,8.4 75.3,11.75 cw(c76.3,11.75) 76.3,12.75 99,12.75 ccw(c99,13.75) 100,13.75 100,81.75 ccw(c99,81.75) 99,82.75 45.6,82.75 ccw(c45.6,81.75) 44.6,81.75 44.6,69.9 cw(c43.6,69.9) 43.6,68.9 1,68.9 ccw(c1,67.9) 0,67.9 0,5.5 ; 1.9,63.25 ccw(c3.5,63.25) 5.1,63.25 5.1,64.85 ccw(c3.5,64.85) 1.9,64.85 1.9,63.25

## Other copper
Top Layer:
  region net +5: 46.35,19.6
  region net +5: 44.75,19.246

## Silkscreen, mask and mechanical layers (free items; w line width, h text height)
Top Overlay:
  drawing of 2450 lines, arcs and shapes, not listed
  text "- +" at 88.093,76.262 h1
  text "- +" at 71.006,76.187 h1
  text "CHISHIN OCP2PCIe" at 15.114,57.738 h2.5
  text "OCP2PCIe-H-F-4  A2.1" at 9.259,53.151 h3
  text "@xiaoxinpro" at 20.032,48.95 h2.25
Bottom Overlay:
  circle w0.2: c35.05,19.95 r3
  circle w0.2: c57.55,75.55 r3
  circle w0.2: c56.25,31.75 r3
  circle w0.2: c88.25,31.75 r3
  circle w0.2: c88.25,63.75 r3
  circle w0.2: c56.25,63.75 r3
  circle w0.2: c3.5,9.35 r3
  lines w0.2: 99.997,22.95 ccw(c100.05,19.95) 100.004,16.95 ; 100,72.55 cw(c100.05,75.55) 100,78.55 ; 0.5,63.25 ccw(c3.5,63.25) 6.5,63.25 6.5,64.85 ccw(c3.5,64.85) 0.5,64.85 0.5,63.25
  lines w0.3: 43.35,19.853 40.668,19.853 40.668,26.635 40.687,26.653 43.35,26.653 ; 91.751,19.853 94.45,19.853 ; 91.8,26.653 94.45,26.653 94.45,19.853 ; 94.45,19.853 94.45,19.853
  lines w0.5: 14.131,58.264 17.192,58.264 17.192,63.414 14.131,63.414 14.131,58.264
  text "- +" at 71.006,74.803 h1
  text "- +" at 88.093,74.471 h1
  text "5V" at 71.514,71.704 h2.25
  text "12V" at 88.621,71.704 h2.25
  text "https://github.com/xiaoxinpro/OCP2PCIe-AltiumDesigner" at 92.761,22.662 h2.25
Mechanical 1:
  circle w0.2: c3.5,9.35 r1.6
  circle w0.2: c35.05,19.95 r1.65
  circle w0.2: c56.25,31.75 r1.6
  circle w0.2: c56.25,63.75 r1.6
  circle w0.2: c88.25,31.75 r1.6
  circle w0.2: c88.25,63.75 r1.6
  circle w0.2: c57.55,75.55 r1.65
  lines w0.2: 54.213,44.562 75.438,65.787 cw(c76.499,64.727) 77.56,63.666 ; 54.213,44.562 ccw(c55.274,43.502) 56.335,42.441 ; 56.33,50.922 69.078,63.67 ccw(c68.017,64.73) 66.956,65.791 ; 56.331,50.922 cw(c55.27,51.983) 54.209,53.043 66.957,65.791 ; 56.334,42.441 77.559,63.666 ; 56.876,38.741 ccw(c57.937,37.68) 58.998,36.619 83.381,61.002 ccw(c82.32,62.063) 81.259,63.123 ; 56.877,38.741 81.259,63.123 ; 61.119,34.498 ccw(c62.18,33.437) 63.241,32.376 87.623,56.759 ; 61.119,34.498 85.502,58.881 ; 75.422,31.83 88.17,44.578 cw(c89.23,43.517) 90.291,42.457 77.543,29.709 ; 75.422,31.831 ccw(c76.483,30.77) 77.544,29.709 ; 85.502,58.881 cw(c86.563,57.82) 87.624,56.759 ; 88.165,53.059 cw(c89.226,51.999) 90.287,50.938 69.062,29.713 cw(c68.001,30.774) 66.94,31.835 88.166,53.059 ; 99.989,73.901 cw(c100.05,75.55) 100,77.199 ; 99.994,21.599 ccw(c100.05,19.95) 100,18.301 ; 0,5.5 ccw(c1,5.5) 1,4.5 10,4.5 ccw(c10,5.5) 11,5.5 11,11.75 cw(c12,11.75) 12,12.75 28.35,12.75 cw(c28.35,11.75) 29.35,11.75 29.35,4.5 37.35,4.5 37.35,10.925 cw(c39.175,10.925) 41,10.925 41,8.4 41,0.5 41.5,0 51.7,0 52.2,0.5 52.2,7.45 cw(c53.15,7.45) 54.1,7.45 54.1,0.5 54.6,0 74.8,0 75.3,0.5 75.3,8.4 75.3,11.75 cw(c76.3,11.75) 76.3,12.75 99,12.75 ccw(c99,13.75) 100,13.75 100,81.75 ccw(c99,81.75) 99,82.75 45.6,82.75 ccw(c45.6,81.75) 44.6,81.75 44.6,69.9 cw(c43.6,69.9) 43.6,68.9 1,68.9 ccw(c1,67.9) 0,67.9 0,5.5 ; 1.9,63.25 ccw(c3.5,63.25) 5.1,63.25 5.1,64.85 ccw(c3.5,64.85) 1.9,64.85 1.9,63.25
Mechanical 3:
  circle w0.2: c3.5,9.35 r1.6
  circle w0.2: c3.5,63.25 r1.6
  circle w0.2: c57.55,75.55 r1.65
  circle w0.2: c35.05,19.95 r1.65
  circle w0.2: c56.25,31.75 r1.6
  circle w0.2: c88.25,31.75 r1.6
  circle w0.2: c56.25,63.75 r1.6
  circle w0.2: c88.25,63.75 r1.6
  lines w0.2: 43.35,17.35 40.65,17.35 40.65,24.15 43.35,24.15 ; 54.213,44.562 75.438,65.787 cw(c76.499,64.727) 77.56,63.666 ; 54.213,44.562 ccw(c55.274,43.502) 56.335,42.441 ; 56.33,50.922 69.078,63.67 ccw(c68.017,64.73) 66.956,65.791 ; 56.331,50.922 cw(c55.27,51.983) 54.209,53.043 66.957,65.791 ; 56.334,42.441 77.559,63.666 ; 56.876,38.741 ccw(c57.937,37.68) 58.998,36.619 83.381,61.002 ccw(c82.32,62.063) 81.259,63.123 ; 56.877,38.741 81.259,63.123 ; 61.119,34.498 ccw(c62.18,33.437) 63.241,32.376 87.623,56.759 ; 61.119,34.498 85.502,58.881 ; 75.422,31.83 88.17,44.578 cw(c89.23,43.517) 90.291,42.457 77.543,29.709 ; 75.422,31.831 ccw(c76.483,30.77) 77.544,29.709 ; 85.502,58.881 cw(c86.563,57.82) 87.624,56.759 ; 88.165,53.059 cw(c89.226,51.999) 90.287,50.938 69.062,29.713 cw(c68.001,30.774) 66.94,31.835 88.166,53.059 ; 91.751,17.35 94.45,17.35 94.45,24.15 91.751,24.15 ; 99.991,21.599 ccw(c100.05,19.95) 100,18.301 ; 100,73.901 cw(c100.05,75.55) 100,77.199 ; 0,0 0,82.75 100,82.75 100,0 41.5,0 0,0

## Text inside footprints (layer, text, board x,y; h text height)
C1: Bottom Overlay "+" at 28.688,35.549 h1
C2: Bottom Overlay "+" at 21.655,62.038 h1 r180
J2: Top Overlay "▶" at 41.666,18.054 h2